# EAGLE board Smart_Charger (1) (EAGLE 8.4.2)
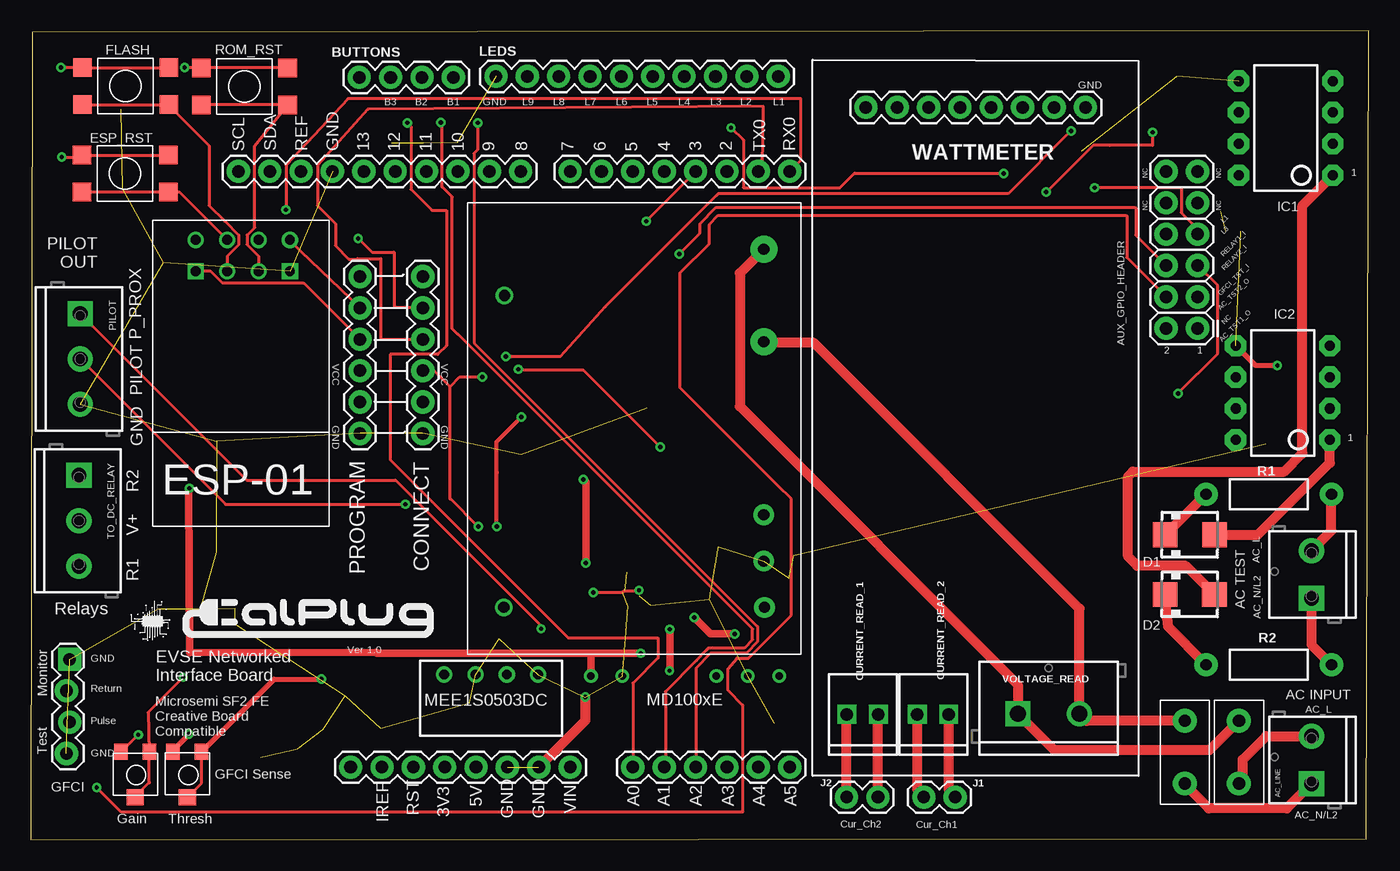
[diagram p0: board, top side]
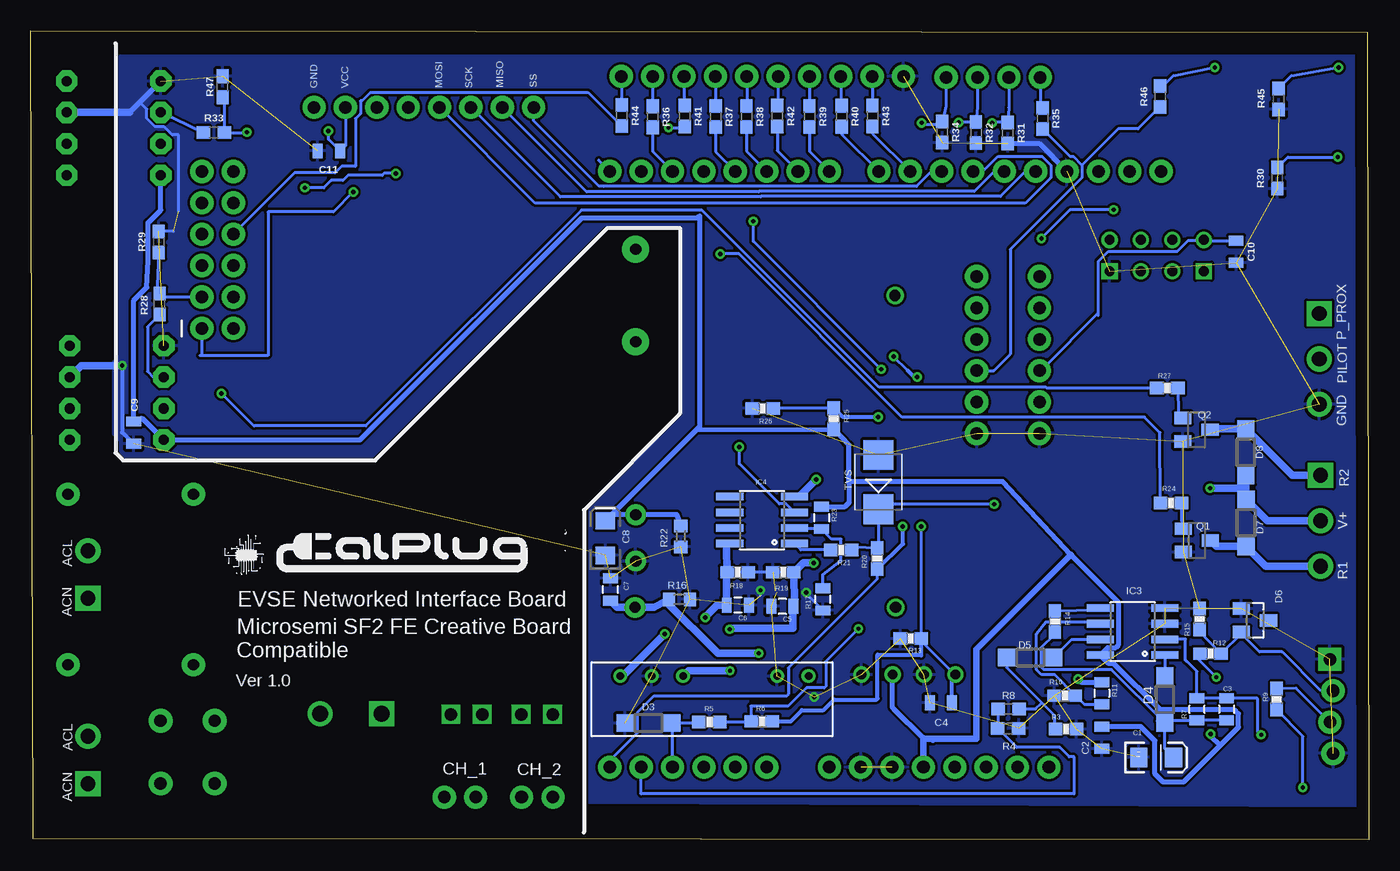
[diagram p1: board, bottom side, seen from below]

Size 108.34 x 65.5 mm. Coordinates in mm from the lower left corner, seen from the top.
Outline: 0,0 108.14,0.1 108.34,65.5 0.1,65.4 0,0
Copper layers (1*16): Top 0.035mm / dielectric 1.5mm / Bottom 0.035mm
Design rules "default": minimum track width 6mil, minimum drill 0.35mm, track to track 6mil, track to pad 6mil, pad to pad 6mil, via to via 6mil, smd to smd 6mil, copper to edge 40mil, drill to drill 6mil, minimum pad ring 10mil, minimum via ring 8mil, stop-mask expansion 4mil, vias tented up to drill 0mil, thermal gap 10mil

## Footprints (pad centres in the part's own frame; a part is rotated, then mirrored left to right if it is on the bottom)
SCREWTERMINAL-3.5MM-2_LOCK = drill 1.2 pad 2.032 square: 1 -0.178,0 | drill 1.2 pad 2.032: 2 3.678,0
2X6 = drill 1.016 pad 1.88: 1 0,0; 2 0,2.54; 3 2.54,0; 4 2.54,2.54; 5 5.08,0; 6 5.08,2.54; 7 7.62,0; 8 7.62,2.54; 9 10.16,0; 10 10.16,2.54; 11 12.7,0; 12 12.7,2.54
1X04 = drill 1.016 pad 1.88: 1 0,0; 2 2.54,0; 3 5.08,0; 4 7.62,0
EIA3216 = smd 1.4 x 1.6: A 1.4,0; C -1.4,0
0805 = smd 0.8 x 1.2: 1 -0.9,0; 2 0.9,0
EIA3216' = smd 1.4 x 1.6: + 1.4,0; - -1.4,0
1X06 = drill 1.016 pad 1.88: 1 0,0; 2 2.54,0; 3 5.08,0; 4 7.62,0; 5 10.16,0; 6 12.7,0
1X02_2.54_SCREWTERM = drill 1.016 square: P1 2.54,0; P2 0,0
SMA = smd 2 x 2: A 2,0; C -2,0
SOD123 = smd 1.4 x 1.4: A 1.9,0; C -1.9,0
SOT23 = smd 1 x 1.4: 1 -0.95,-1.1; 2 0.95,-1.1; 3 0,1.1
MPM-04E-1205 = drill 0.9 pad 1.676: 5V 3,25.25; 12V 2.95,32.75; GND 3,29 | drill 0.9 pad 2.184: ACL 3,3.75; ACN 3,11.25 | drill 0.9 pad 1.422: NC1 24,7.5 | drill 0.9: NC2 24.05,32.75
DIP_5 = drill 0.6: 1 1.93,1.13; 2 4.47,1.13; 3 12.09,1.13; 4 14.63,1.13; 5 17.17,1.13
ESP01 = drill 0.8: CH_PD -1.285,-8.178; GPIO0 1.255,-5.638; GPIO2 -1.285,-5.638; RST 1.255,-8.178; TX -3.825,-8.178; VCC 3.795,-8.178 | drill 0.8 square: GND -3.825,-5.638; RX 3.795,-5.638
BT4.5X4.5 = smd 1.5 x 1.5: P -3.5,1.5; P1 3.5,1.5; S -3.5,-1.5; S1 3.5,-1.5
BELFUSE1A = drill 1 pad 1.93: IN 2,1.66; OUT 2,6.74
1X04_LOCK = drill 1.016 pad 1.88 square: 1 0,0.127 | drill 1.016 pad 1.88: 2 2.54,-0.127; 3 5.08,0.127; 4 7.62,-0.127
DIP08 = drill 0.813 pad 1.727 octagon: 1 -3.81,-3.81; 2 -1.27,-3.81; 3 1.27,-3.81; 4 3.81,-3.81; 5 3.81,3.81; 6 1.27,3.81; 7 -1.27,3.81; 8 -3.81,3.81
SO08 = smd 0.61 x 2.21: 1 -1.905,-2.616; 2 -0.635,-2.616; 3 0.635,-2.616; 4 1.905,-2.616; 5 1.905,2.616; 6 0.635,2.616; 7 -0.635,2.616; 8 -1.905,2.616
1X02 = drill 1.016 pad 1.88: 1 0,0; 2 2.54,0
1X10 = drill 1.016 pad 1.88: 1 0,0; 2 2.54,0; 3 5.08,0; 4 7.62,0; 5 10.16,0; 6 12.7,0; 7 15.24,0; 8 17.78,0; 9 20.32,0; 10 22.86,0
4SIL = drill 0.8: 1 1.95,1.13; 2 4.49,1.13; 3 7.03,1.13; 4 9.57,1.13
SCREWTERMINAL-3.5MM-3_LOCK.007S = drill 1.2 pad 2.032 square: 1 -0.178,0 | drill 1.2 pad 2.032: 2 3.5,0; 3 7.178,0
PV3G = smd 1.1 x 1.3: P$1 0,0; P$3 2.3,0 | smd 1.4 x 1.3: P$2 1.15,3.7
AXIAL-0.4 = drill 0.9 pad 1.88: P$1 -5.08,0; P$2 5.08,0
0603-RES = smd 1.1 x 1: 1 -0.85,0; 2 0.85,0
0603 = smd 1.1 x 1: 1 -0.85,0; 2 0.85,0
R0603 = smd 1 x 1.1: 1 -0.85,0; 2 0.85,0
1X08 = drill 1.016 pad 1.88: 1 0,0; 2 2.54,0; 3 5.08,0; 4 7.62,0; 5 10.16,0; 6 12.7,0; 7 15.24,0; 8 17.78,0
SMB = smd 2.4 x 2.4: A 2.2,0; C -2.2,0
SCREWTERMINAL-5MM-2 = drill 1.3 pad 2.032 square: 1 0,0 | drill 1.3 pad 2.032: 2 5,0

## Placement (x,y rotation side)
AC_LINE  TE 1776275-2  [SCREWTERMINAL-3.5MM-2_LOCK]  103.71,4.73 90 top
AC_TEST  TE 1776275-2  [SCREWTERMINAL-3.5MM-2_LOCK]  103.71,19.74 90 top
AUX_GPIO_HEADER  2X6 FEMALE  [2X6]  94.48,41.42 90 top
BUTTONS  [1X04]  34.21,61.74 180 top
C1  10uf  [EIA3216]  17.2,6.68 0 bottom
C2  1.0uF  [0805]  21.6,8.28 90 bottom
C3  .1uf  [0805]  11.5,10.58 270 bottom
C4  4.7uF  [0805]  34.64,11.11 180 bottom
C5  1uf  [0805]  47.47,18.91 180 bottom
C6  1uf  [0805]  51.08,19.01 180 bottom
C7  2.2uf  [0805]  61.4,20.28 90 bottom
C8  10uF  [EIA3216']  61.81,24.44 90 bottom
C9  1.0uF  [0805]  100.02,32.98 270 bottom
C10  1.0uF  [0805]  10.73,47.62 270 bottom
C11  1.0uF  [0805]  84.2,55.78 180 bottom
CONNECT  FTDI  [1X06]  31.74,45.61 270 top
CURRENT_READ_1  [1X02_2.54_SCREWTERM]  68.63,10.17 180 top
CURRENT_READ_2  [1X02_2.54_SCREWTERM]  74.33,10.17 180 top
D1  1N4004  [SMA]  93.85,24.71 0 top
D2  1N4004  [SMA]  93.85,19.88 0 top
D3  1N4148  [SOD123]  58.32,9.47 180 bottom
D4  1N4148  [SOD123]  16.5,11.38 90 bottom
D5  1N4148  [SOD123]  27.4,14.78 0 bottom
D6  BAS40-06  [SOT23]  9.2,17.78 270 bottom
D7  1N4148  [SOD123]  9.93,25.67 270 bottom
D8  1N4148  [SOD123]  9.94,31.39 90 bottom
DC1  MPM-04E-1205  [MPM-04E-1205]  62.35,51.58 180 top
DC2  NNM+-12V  [DIP_5]  43.43,14.39 180 bottom
ESP1  ESP01  [ESP01]  17.15,40.4 180 top
ESP_RST  [BT4.5X4.5]  7.62,53.94 180 top
F1  BEL1AFUSE  [BELFUSE1A]  95.45,11.31 180 top
F2  BEL1AFUSE  [BELFUSE1A]  99.83,11.31 180 top
FLASH  [BT4.5X4.5]  7.68,61.03 180 top
GFCI  [1X04_LOCK]  3.01,14.62 270 top
IC1  MID400  [DIP08]  101.62,57.63 90 top
IC2  MID400  [DIP08]  101.38,36.2 90 top
IC3  LMV358  [SO08]  19.11,16.87 90 bottom
IC4  LMV358  [SO08]  49.11,25.89 90 bottom
J1  [1X02]  72.31,3.46 0 top
J2  [1X02]  66.06,3.46 0 top
LEDS  [1X10]  37.66,61.82 0 top
MEE1S0503DC  NKE0305DC  [4SIL]  43.04,14.53 180 top
PILOT  Pilot  [SCREWTERMINAL-3.5MM-3_LOCK.007S]  3.99,42.44 270 top
POT1  10k  [PV3G]  13.82,7.15 180 top
POT2  2k  [PV3G]  9.6,7.15 180 top
PROGRAM  FTDI  [1X06]  26.65,45.61 270 top
Q1  2222A  [SOT23]  13.91,24.25 270 bottom
Q2  2222A  [SOT23]  13.94,33.21 270 bottom
R1  47K  [AXIAL-0.4]  100.25,27.99 180 top
R2  47K  [AXIAL-0.4]  100.25,14.19 180 top
R3  10k  [0603-RES]  24.5,8.98 0 bottom
R4  2.0k  [0603]  29.19,9.04 180 bottom
R5  10k  [0603-RES]  53.38,9.55 180 bottom
R6  1k  [0603-RES]  49.13,9.61 180 bottom
R7  100k  [0805]  13.9,10.58 90 bottom
R8  1k  [0603]  29.17,10.61 180 bottom
R9  330  [0603-RES]  7.45,11.4 90 bottom
R10  4k  [0603-RES]  24.6,11.68 180 bottom
R11  15k  [0805]  21.6,11.88 270 bottom
R12  100  [0603-RES]  12.8,15.08 0 bottom
R13  100  [0603-RES]  37.08,16.31 180 bottom
R14  100  [0603-RES]  25.4,17.68 270 bottom
R15  330  [0603-RES]  13.7,17.88 270 bottom
R16  330  [R0603]  55.8,19.48 180 bottom
R17  50k  [0805]  44.2,19.48 90 bottom
R18  2.4k  [0603-RES]  51.1,21.68 180 bottom
R19  2.4k  [0603-RES]  47.4,21.68 180 bottom
R20  40k  [0603-RES]  39.8,22.78 90 bottom
R21  650  [0603-RES]  42.7,23.48 180 bottom
R22  180  [R0603]  55.7,24.58 90 bottom
R23  50k  [0805]  44.3,26.08 270 bottom
R24  330  [0603-RES]  16,27.28 180 bottom
R25  15k  [0603-RES]  43.32,34.1 270 bottom
R26  10k  [0603-RES]  49.06,34.94 180 bottom
R27  330  [0603-RES]  16.3,36.58 180 bottom
R28  1k  [0603]  97.9,43.38 90 bottom
R29  2.0k  [0603]  97.99,48.42 270 bottom
R30  2.0k  [0603]  7.39,53.58 90 bottom
R31  2.0k  [0603]  29.23,57.24 270 bottom
R32  2.0k  [0603]  31.8,57.26 270 bottom
R33  1k  [0603]  93.52,57.27 0 bottom
R34  2.0k  [0603]  34.53,57.31 270 bottom
R35  75  [0603]  26.41,58.42 270 bottom
R36  10  [0603]  57.98,58.55 270 bottom
R37  10  [0603]  52.88,58.56 270 bottom
R38  10  [0603]  50.38,58.57 270 bottom
R39  10  [0603]  45.28,58.58 270 bottom
R40  10  [0603]  42.68,58.59 270 bottom
R41  75  [0603]  55.38,58.6 270 bottom
R42  75  [0603]  47.88,58.61 270 bottom
R43  75  [0603]  40.18,58.62 270 bottom
R44  10  [0603]  60.48,58.64 270 bottom
R45  2.0k  [0603]  7.29,59.99 90 bottom
R46  33  [0603]  16.89,60.2 90 bottom
R47  2.0k  [0603]  92.8,60.98 90 bottom
ROM_RST  [BT4.5X4.5]  17.3,61.01 180 top
SF2_HEAD_1  [1X10]  16.8,54.13 0 top
SF2_HEAD_2  [1X08]  43.67,54.13 0 top
SF2_HEAD_3  [1X06]  48.75,5.89 0 top
SF3_HEAD_4  [1X08]  25.89,5.89 0 top
TO_DC_RELAY  [SCREWTERMINAL-3.5MM-3_LOCK.007S]  3.89,29.34 270 top
TVS  P6SMB16A  [SMB]  39.7,28.98 90 bottom
VOLTAGE_READ  [SCREWTERMINAL-5MM-2]  79.93,10.22 0 top
WATTMETER  [1X08]  67.62,59.31 0 top

## Library data of the parts
AC_LINE AC_TEST C1 C3 C5-C7 CONNECT GFCI IC1-IC4 PILOT PROGRAM R1-R3 R5-R7 R9-R15 R17-R21 R23-R27 TO_DC_RELAY = SparkFun
AUX_GPIO_HEADER = SparkFun-Connectors; PROD_ID: CONN-12423
BUTTONS = SparkFun-Connectors; PROD_ID: CONN-09696
C2 C4 C9-C11 = SparkFun-Capacitors; PROD_ID: CAP-11625
C8 = SparkFun-Capacitors; PROD_ID: CAP-00811
CURRENT_READ_1 CURRENT_READ_2 J1 J2 = SparkFun-Connectors
D1-D8 TVS = diode
DC1 = Qxd; SPICEPREFIX: X
DC2 = DCDCconverters
ESP1 = esp8266modules
ESP_RST FLASH ROM_RST = buttons
F1 F2 = Qxd
LEDS SF2_HEAD_1 = SparkFun-Connectors; PROD_ID: CONN-11563
MEE1S0503DC = NKE0503DC
POT1 POT2 = small_trimmer
Q1 Q2 = transistor-npn
R4 R29-R32 R34 R45 R47 = SparkFun-Resistors; PROD_ID: RES-08296
R8 R28 R33 = SparkFun-Resistors; PROD_ID: RES-07856
R16 R22 = rcl
R35 R41-R43 = SparkFun-Resistors; PROD_ID: RES-09737
R36-R40 R44 = SparkFun-Resistors; PROD_ID: RES-12581
R46 = SparkFun-Resistors; PROD_ID: RES-08270
SF2_HEAD_2 SF3_HEAD_4 WATTMETER = SparkFun-Connectors; PROD_ID: CONN-08438
SF2_HEAD_3 = SparkFun-Connectors; PROD_ID: CONN-08437
VOLTAGE_READ = SparkFun-Connectors; SF_SKU: PRT-08432

## Nets
3.3V: C4.1 C11.1 CONNECT.4 MEE1S0503DC.4 R6.1 R13.1 R35.2 R46.1 WATTMETER.7
12V: C6.2 DC2.5 IC4.8 R18.2
+5V: C2.2 C8.+ C9.1 DC1.5V IC1.8 IC2.8 IC3.8 MEE1S0503DC.2 POT1.P$3 R22.2 R23.1 R25.2 SF3_HEAD_4.5
+12V: C7.1 D7.C D8.C DC1.12V DC2.1 R16.2 TO_DC_RELAY.2
-12V: C5.1 DC2.3 IC4.4 R19.1
AC_TEST: AUX_GPIO_HEADER.1 R33.2 R47.1
AC_TEST_2: AUX_GPIO_HEADER.3 R28.2 R29.2
AREF: SF2_HEAD_1.3
BUTTON3: BUTTONS.3 R31.1 SF2_HEAD_3.1
CURRENT_CHANNEL_1: CURRENT_READ_2.P2 J1.2
CURRENT_CHANNEL_1_2: CURRENT_READ_2.P1 J1.1
CURRENT_CHANNEL_2: CURRENT_READ_1.P2 J2.2
CURRENT_CHANNEL_2_2: CURRENT_READ_1.P1 J2.1
DC_RELAY_1: AUX_GPIO_HEADER.6 R24.2
DC_RELAY_2: AUX_GPIO_HEADER.5 R27.2
EEPROM_RST: ESP1.GPIO2 ROM_RST.P ROM_RST.P1
EMPTY: SF3_HEAD_4.1
ESP_FLASH: ESP1.GPIO0 FLASH.P FLASH.P1
ESP_RST: ESP1.RST ESP_RST.P ESP_RST.P1
FORCE_START: BUTTONS.1 R34.1 SF2_HEAD_3.3
FORCE_STOP: BUTTONS.2 R32.1 SF2_HEAD_3.2
FUSEL: DC1.ACL F2.IN VOLTAGE_READ.1
FUSEN: DC1.ACN F1.IN VOLTAGE_READ.2
GFCI_INT: R4.2 R8.2 SF2_HEAD_3.5
GFCI_TEST: AUX_GPIO_HEADER.4 R9.1
GND: C1.C C2.1 C4.2 C5.2 C6.1 C7.2 C8.- C9.2 C10.2 C11.2 CONNECT.6 D3.A D6.1 DC1.GND DC2.2 DC2.4 ESP1.GND GFCI.1 GFCI.4 IC1.3 IC1.5 IC2.3 IC2.5 IC3.3 IC3.4 LEDS.1 MEE1S0503DC.1 MEE1S0503DC.3 PILOT.3 PROGRAM.6 Q1.2 Q2.2 R3.2 R4.1 R10.2 R13.2 R15.1 R16.1 R17.1 R18.1 R19.2 R22.1 R26.2 R29.1 R30.1 R31.2 R32.2 R34.2 R45.1 R47.2 SF2_HEAD_1.4 SF3_HEAD_4.6 SF3_HEAD_4.7 TVS.A
IOREF: SF3_HEAD_4.2
L1: AUX_GPIO_HEADER.8 R44.2
L2: R36.2 SF2_HEAD_2.6
L3: AUX_GPIO_HEADER.7 R41.2
L4: R37.2 SF2_HEAD_2.4
L5: R38.2 SF2_HEAD_2.3
L6: R42.2 SF2_HEAD_2.2
L7: R39.2 SF2_HEAD_2.1
L8: R40.2 SF2_HEAD_1.10
L9: R43.2 SF2_HEAD_1.9
MISO: SF2_HEAD_1.6 WATTMETER.2
MOSI: SF2_HEAD_1.7 WATTMETER.4
N$1: D8.A Q2.3 TO_DC_RELAY.1
N$2: Q2.1 R27.1
N$3: IC2.6 R28.1
N$4: D5.C R3.1 R8.1
N$5: POT2.P$1 POT2.P$2 R12.1
N$6: D7.A Q1.3 TO_DC_RELAY.3
N$7: POT1.P$1 POT1.P$2 R11.1
N$8: C3.1 IC3.2 POT2.P$3 R7.2
N$9: D1.C R1.P$2
N$10: IC4.2 R17.2 R23.2
N$11: IC4.1 R21.2
N$12: AC_LINE.2 F2.OUT
N$13: AC_LINE.1 F1.OUT
N$14: LEDS.10 R44.1
N$15: LEDS.9 R36.1
N$16: LEDS.8 R41.1
N$17: AC_TEST.2 R1.P$1
N$18: LEDS.7 R37.1
N$19: D1.A IC2.1
N$20: D6.2 GFCI.2 R12.2 R15.2
N$21: D4.A IC3.1
N$22: GFCI.3 R9.2
N$23: C1.A C3.2 D4.C R7.1 R14.2
N$24: IC3.6 R10.1 R11.2
N$25: D5.A IC3.7
N$26: IC3.5 R14.1
N$27: D2.C R2.P$2
N$28: D2.A IC1.1
N$29: AC_TEST.1 R2.P$1
N$30: Q1.1 R24.1
N$50: LEDS.6 R38.1
N$51: LEDS.5 R42.1
N$52: LEDS.4 R39.1
N$54: LEDS.2 R43.1
N$73: ESP1.CH_PD
N$75: LEDS.3 R40.1
N$77: R46.2 ROM_RST.S ROM_RST.S1
N$78: FLASH.S FLASH.S1 R45.2
N$81: IC1.6 R33.1
N$83: ESP_RST.S ESP_RST.S1 R30.2
N$93: BUTTONS.4 R35.1
NC3: WATTMETER.8
PILOT: PILOT.2 R20.2 R21.1 TVS.C
PILOTREAD: R20.1 R25.1 R26.1 SF2_HEAD_3.6
PP: PILOT.1 R5.1 R6.2
PP_READ: D3.C R5.2 SF2_HEAD_3.4
PWM: IC4.3 SF2_HEAD_2.5
RESET: SF3_HEAD_4.3
RX: CONNECT.2 SF2_HEAD_2.8
RX_E: ESP1.RX PROGRAM.3
SCK: SF2_HEAD_1.5 WATTMETER.3
SCL: SF2_HEAD_1.1
SDA: SF2_HEAD_1.2
SS: SF2_HEAD_1.8 WATTMETER.1
TX: CONNECT.3 SF2_HEAD_2.7
TX_E: ESP1.TX PROGRAM.2
VCC_E: C10.1 ESP1.VCC PROGRAM.4
VIN: SF3_HEAD_4.8

## Tracks (layer width: path | path; a pad name or v marks a point on that pad's centre or on a via)
3.3V  (via drill 0.35)
  Top 0.254: v84.24,57.4 79.16,52.32 55.98,52.32 55.98,52.33 55.89,52.32 55.65,52.32 55.64,52.31 | 55.64,52.31 55.65,52.31 55.66,52.32 55.82,52.33 | 55.64,52.31 55.53,52.19 46.51,43.16 42.86,39.14 v38.46,39.14 | v36.23,25.37 33.98,27.62 33.94,27.62 33.94,36.7 | 33.94,36.7 32.65,37.99 CONNECT.4 | v36.57,37.49 34.74,37.49 33.94,36.7
  Bottom 0.152: 36.18,16.29 36.23,16.24
  Bottom 0.254: 23.2,54.64 23.92,55.35 24.19,55.35 R35.2 | 23.2,54.64 23.2,53.63 29.02,47.81 29.02,39.34 30.37,37.99 CONNECT.4 | R46.1 18.67,57.57 20.27,57.57 23.2,54.64 | WATTMETER.7 82.86,56.22 C11.1 84.24,56.71 v84.24,57.4 | 37.32,37.99 v38.46,39.14 | 33.74,13.12 33.5,13.37 36.23,16.1 36.23,16.24 v36.23,25.37
  Bottom 0.305: v36.57,37.49 36.82,37.49 37.32,37.99 | C4.1 33.74,13.12 MEE1S0503DC.4 | R6.1 46.8,9.61 45.9,10.51 44.14,10.51 43.28,11.37 39.85,11.37 39.77,11.46 39.77,15 36.28,15 36.22,14.95 36.22,16.1 36.23,16.1
  Bottom 0.406: R13.1 36.18,16.29
12V  (via drill 0.35)
  Top 0.61: v53.74,18 55.03,16.7 56.9,16.7 56.92,16.68 v57,16.68
  Bottom 0.254: 52,23.71 arc90 IC4.8
  Bottom 0.61: 52,23.71 R18.2 51.98,21.66 C6.2 52.77,19.01 53.63,18.15 53.63,18.11 v53.74,18 | v57,16.68 60.41,13.26 DC2.5
+5V  (via drill 0.35)
  Top 0.406: POT1.P$3 11.52,7.28 v12.81,8.57
  Bottom 0.406: R22.2 56.03,26.33 DC1.5V 61.32,26.33 C8.+ 54.45,33.2 | 12.02,7.66 10.55,9.13 10.55,10.23 10.86,10.54 16.88,10.54 20.62,14.28 21.05,14.28 IC3.8 21.12,15.58 20.48,15.58 20.27,15.78 20.27,19.23 24.13,23.09 29.62,29.01 41.9,29.01 42.08,28.83 | R23.1 42.41,26.98 42.08,27.31 42.08,28.83 | 54.45,33.2 R25.2 42.08,31.97 42.08,28.83 | 54.45,33.2 54.19,33.47 54.19,50.52 54.34,50.37 63.71,50.37 81.69,32.39 IC2.8 99.31,34.13 C9.1 100.01,33.89 100.01,43.68 98.94,44.75 98.84,46.88 98.84,49.97 97.81,51 IC1.8 | 36.05,8.23 38.46,10.64 arc90 38.55,10.72 MEE1S0503DC.2 | v12.81,8.57 12.81,8.46 12.02,7.66 | 12.02,7.66 15.01,4.68 16.64,4.68 17.31,5.34 17.31,8.04 18.46,9.18 C2.2
  Bottom 0.508: 24.13,23.09 31.77,15.45 31.77,8.18 35.2,8.18 | 35.2,8.18 35.28,8.1 | 35.2,8.18 36,8.18 36.05,8.23 SF3_HEAD_4.5
+12V  (via drill 0.35)
  Top 0.61: v12.84,28.47 12.79,28.42 12.88,15.14 27.97,15.18 28.02,15.13 45.3,15.13 | v49.39,15.12 v49.38,15.13 49.02,15.13 45.3,15.13 | DC2.1 45.36,15.06 45.3,15.13
  Bottom 0.61: TO_DC_RELAY.2 8.2,25.84 D7.C 9.93,28.47 | 9.93,28.47 D8.C | v12.84,28.47 9.93,28.47 | 56.92,19.34 R16.2 | 56.92,19.34 57.88,18.83 DC1.12V 60.85,18.83 C7.1 | v49.39,15.12 52.71,15.12 56.92,19.34
-12V  (via drill 0.35)
  Top 0.61: v44.74,29.18 44.97,28.95 44.97,22.45 v44.94,22.43 | v51.75,17.06 51.76,17.06 51.76,13.74 v51.72,13.7
  Bottom 0.61: IC4.4 46.15,27.8 44.76,29.18 v44.74,29.18 | v44.94,22.43 45.76,22.43 R19.1 46.5,18.98 C5.1 46.64,18.85 46.64,17.14 51.64,17.14 51.74,17.04 51.75,17.05 v51.75,17.06 | v51.72,13.7 55.09,13.7 DC2.3
AC_TEST  (via drill 0.35)
  Top 0.254: v90.84,57.3 90.84,56.23 87.38,56.23 86.04,56.23 82.23,52.43 82.21,52.43 82.23,52.44 v82.23,52.46
  Bottom 0.254: R47.1 92.67,60 R33.2 90.74,57.27 90.7,57.24 90.77,57.24 v90.84,57.3 | AUX_GPIO_HEADER.1 94.48,39.35 94.63,39.2 89.13,39.2 89.13,50.86 83.84,50.86 v82.23,52.46
AC_TEST_2
  Bottom 0.254: R29.2 98.15,43.98 R28.2 97.63,43.96 AUX_GPIO_HEADER.3
BUTTON3  (via drill 0.35)
  Top 0.254: v30.49,58.06 30.79,57.76 30.79,52.67 32.49,50.97 33.66,50.97 33.66,40.03 32.94,39.31 29.09,39.31 | 29.09,39.31 | 29.09,39.31 29.09,30.77 43.51,16.36 50.78,16.36 50.81,16.33 50.81,14.75 48.75,12.7 SF2_HEAD_3.1
  Bottom 0.254: BUTTONS.3 29.13,59.3 R31.1 | R31.1 29.23,57.83 | R31.1 30.46,58.09 v30.49,58.06
CURRENT_CHANNEL_1
  Top 0.813: J1.2 74.33,4.13 CURRENT_READ_2.P2
CURRENT_CHANNEL_1_2
  Top 0.813: J1.1 71.79,4.13 CURRENT_READ_2.P1
CURRENT_CHANNEL_2
  Top 0.813: J2.2 68.6,10.14 CURRENT_READ_1.P2
CURRENT_CHANNEL_2_2
  Top 0.813: J2.1 66.06,10.14 CURRENT_READ_1.P1
DC_RELAY_1  (via drill 0.35)
  Top 0.254: v52.5,47.43 54.17,49.11 54.17,49.89 55.5,51.22 89.43,51.22 89.47,51.18 89.47,48.97 AUX_GPIO_HEADER.6
  Bottom 0.254: R24.2 16.9,32.98 18.16,34.23 37.79,34.23 51.01,47.44 52.42,47.44 52.45,47.41 52.47,47.43 v52.5,47.43
DC_RELAY_2  (via drill 0.35)
  Top 0.254: v92.9,36.15 96.12,39.37 96.12,44.91 94.53,46.5 AUX_GPIO_HEADER.5
  Bottom 0.254: R27.2 26.06,36.58 26.15,36.67 39.66,36.67 53.99,51 63.76,51 81.23,33.53 90.23,33.53 90.27,33.5 92.9,36.13 v92.9,36.15
EEPROM_RST
  Top 0.254: ESP1.GPIO2 18.44,47.26 17.51,48.19 17.51,48.97 18.12,49.58 18.12,56.2 20.58,59.29 20.58,59.51 | 20.58,59.51 ROM_RST.P1 | 20.58,59.51 ROM_RST.P
ESP_FLASH
  Top 0.254: FLASH.P1 FLASH.P 11.18,59.46 14.43,56.21 14.43,51.37 15.68,50.11 | ESP1.GPIO0 15.9,47.26 16.83,48.19 16.83,48.97 15.68,50.11 | 15.68,50.11 15.58,50.21
ESP_RST
  Top 0.254: ESP_RST.P1 ESP_RST.P 12.04,52.44 ESP1.RST
FORCE_START  (via drill 0.35)
  Top 0.254: SF2_HEAD_3.3 53.93,6.02 53.93,13.96 55.04,15.13 57.94,15.13 58.86,16.05 58.86,17.27 35.9,40.22 35.89,55.58 36.19,55.89 v36.19,58.06
  Bottom 0.254: BUTTONS.1 34.21,59.39 R34.1 34.53,57.91 36.04,57.91 v36.19,58.06
FORCE_STOP  (via drill 0.35)
  Top 0.254: 33.26,58.02 v33.2,58.08 33.3,57.98 33.3,52.88 34.13,52.05 34.13,41.37 34.56,40.94 34.61,40.94 58.45,17.1 58.45,16.22 57.77,15.54 55.2,15.54 55.2,15.55 55.04,15.54 54.87,15.54 54.86,15.54 54.75,15.42 54.64,15.3 53.91,14.54 51.38,12 51.38,5.98 SF2_HEAD_3.2
  Bottom 0.254: BUTTONS.2 31.67,59.36 R32.1 | R32.1 31.8,57.86 | R32.1 33.16,58.11 33.17,58.12 33.2,58.09 v33.2,58.08
FUSEL
  Top 0.813: F2.IN 95.47,7.29 82.86,7.29 VOLTAGE_READ.1 79.93,12.59 57.41,35.1 57.41,45.89 DC1.ACL
FUSEN
  Top 0.813: DC1.ACN 59.43,40.25 63.41,40.25 84.93,18.74 VOLTAGE_READ.2 85.5,9.65 F1.IN
GFCI_INT
  Bottom 0.254: R8.2 30.02,9.07 R4.2 28.5,7.5 25.02,7.5 24.24,6.72 23.84,6.72 23.84,3.76 23.87,3.73 58.89,3.73 58.92,3.7 SF2_HEAD_3.5
GFCI_TEST  (via drill 0.35)
  Top 0.254: AUX_GPIO_HEADER.4 88.74,47.16 88.74,50.53 88.7,50.57 55.66,50.57 54.94,49.85 54.94,48.28 52.59,45.93 52.59,36.6 60.52,28.67 61.58,27.61 61.58,18.2 58.11,14.73 57.18,14.73 56.47,13.85 56.47,12.11 57.65,10.92 57.65,2.25 7.33,2.25 v5.33,4.25
  Bottom 0.254: v5.33,4.25 5.33,8.38 R9.1
GND  (via drill 0.35)  (48 unrouted)
  Top 0.254: v45.54,20.05 47.92,20.05 48.06,20.19 49.23,20.19 v49.25,20.22
  Top 0.406: v100.95,38.4 99.18,38.4 IC2.5
  Top 0.813: v44.9,11.57 44.9,9.66 SF3_HEAD_4.7
  Bottom 0.254: 96.79,49.27 R29.1 | 96.37,50.89 96.37,57.09 96.89,57.09 97.55,57.76 98.29,57.76 98.96,58.43 98.96,59.16 99.52,59.73 | R19.2 R18.1 | R17.1 45.54,19.92 v45.54,20.05 45.54,20.14 | v49.25,20.22 49.25,19.79
  Bottom 0.305: v100.95,38.4 100.95,33 C9.2
  Bottom 0.406: 100.35,58.9 99.52,59.73 IC1.5 | R31.2 26.68,56.39 SF2_HEAD_1.4
  Bottom 0.61: v100.95,38.4 104.26,38.4 IC2.3 | IC1.3 100.35,58.9
  pour Bottom (isolate 0.203): 0.78,63.45 101.16,63.45 101.16,39.24 101.67,38.72 101.67,32.83 101.1,32.27 101.1,31.45 100.68,31.03 80.65,31.03 61.88,49.79 56.59,49.79 55.48,49.76 55.48,34.37 63.1,26.86 63.1,3.05 0.79,2.76 0.79,63.15 0.94,63.3
L1
  Bottom 0.254: AUX_GPIO_HEADER.8 86.99,54 83.71,54 83.18,54.53 82.05,54.53 82.05,58.4 81.64,58.81 81.64,59.81 81.62,59.84 81.52,59.84 80.83,60.53 63.22,60.53 R44.2
L2
  Bottom 0.254: SF2_HEAD_2.6 57.98,55.74 R36.2
L3  (via drill 0.35)
  Top 0.254: v56.7,57.66 57.69,56.67 57.69,52.81 65.53,52.81 66.7,53.98 78.75,53.98 v78.78,53.96 | v86.14,52.8 93.12,52.8 93.16,52.76 93.16,50.79 94.48,49.47 AUX_GPIO_HEADER.7
  Bottom 0.254: R41.2 55.5,57.63 56.67,57.63 v56.7,57.66 | v78.78,53.96 79.75,53.96 79.89,53.81 82.65,53.81 83.05,53.41 84.02,53.41 84.63,52.8 86.07,52.8 | 86.01,52.78 86.03,52.76 86.07,52.8 | 86.07,52.8 v86.14,52.8
L4
  Bottom 0.254: SF2_HEAD_2.4 52.88,55.72 R37.2
L5
  Bottom 0.254: SF2_HEAD_2.3 50.38,55.76 R38.2
L6
  Bottom 0.254: SF2_HEAD_2.2 47.88,55.8 R42.2
L7
  Bottom 0.254: SF2_HEAD_2.1 45.28,55.74 R39.2
L8
  Bottom 0.254: SF2_HEAD_1.10 42.61,57.07 42.68,57.15 R40.2
L9
  Bottom 0.254: SF2_HEAD_1.9 40.18,57.19 R43.2
MISO
  Bottom 0.254: SF2_HEAD_1.6 30.32,54.13 31.95,52.51 49.38,52.51 49.41,52.47 63.33,52.47 WATTMETER.2
MOSI
  Bottom 0.254: SF2_HEAD_1.7 31.23,54.13 30.01,55.35 26.46,55.35 25.74,54.64 25.74,53.63 27.81,51.56 67.49,51.56 WATTMETER.4
N$1
  Bottom 0.254: D8.A 9.57,32.92
  Bottom 0.61: Q2.3 12.76,33.29 D8.A 6.17,29.52 TO_DC_RELAY.1
N$2
  Bottom 0.254: R27.1 15.4,34.52 Q2.1
N$3
  Bottom 0.254: R28.1 98.89,41.54 98.89,37.95 98.42,37.47 IC2.6
N$4
  Bottom 0.254: D5.C 29.3,13.95 26.48,11.12 | 26.48,11.12 25.46,10.11 25.46,9.04 R3.1 | R8.1 26.98,10.61 26.48,11.12
N$5  (via drill 0.35)
  Top 0.254: v12.34,13.18 9.5,10.34 POT2.P$1 9.6,4.68 | 9.6,4.68 9.6,4.6 | POT2.P$2 8.45,3.53 9.6,4.68
  Bottom 0.254: v12.34,13.18 13.7,14.55 R12.1
N$6
  Bottom 0.61: Q1.3 12.33,23.77 D7.A 8.33,22.16 TO_DC_RELAY.3
N$7  (via drill 0.35)
  Top 0.254: POT1.P$2 13.82,4.61 POT1.P$1
  Top 0.406: POT1.P$1 19.7,13.03 v23.52,13.03
  Bottom 0.406: v23.52,13.03 23.27,12.78 R11.1
N$8  (via drill 0.35)
  Top 0.254: POT2.P$3 7.33,7.15 v8.7,8.51
  Bottom 0.152: 16.03,16.24 16.34,16.24 IC3.2
  Bottom 0.254: C3.1 R7.2 13.9,13.66 14.71,14.46 14.76,14.46 14.84,14.54 14.84,16.27 14.87,16.24 16.34,16.24 | 11.37,11.61 C3.1 | C3.1 11.48,11.46 9.03,11.46 8.99,11.41 8.99,8.77 v8.7,8.51
N$9
  Top 0.813: D1.C 91.9,24.71 R1.P$2
N$10
  Bottom 0.254: IC4.2 46.42,25.18 R23.2 43.48,24.36 43.09,24.36 42.72,24.35 42.72,22.62 44.2,21.49 R17.2
N$11
  Bottom 0.254: R21.2 45.99,23.48 IC4.1
N$12
  Top 0.813: F2.OUT 98.14,4.88 98.14,6.5 100.05,8.41 AC_LINE.2
N$13
  Top 0.813: AC_LINE.1 101.73,2.57 95.39,2.56 93.45,4.49 F1.OUT
N$14
  Bottom 0.254: LEDS.10 60.52,59.53 R44.1
N$15
  Bottom 0.254: LEDS.9 R36.1
N$16
  Bottom 0.254: LEDS.8 55.44,59.51 R41.1
N$17
  Top 0.813: AC_TEST.2 105.33,25.04 R1.P$1
N$18
  Bottom 0.254: LEDS.7 52.9,59.43 R37.1
N$19
  Top 0.813: D1.A 99.37,24.71 105.19,30.54 IC2.1
N$20
  Bottom 0.254: 10.3,16.68 D6.2 | 10.3,16.68 R12.2 13.7,16.88 R15.2 | GFCI.2 3.86,12.08 7,15.22 8.84,15.22 10.3,16.68
N$21
  Bottom 0.254: IC3.1 D4.A
N$22
  Bottom 0.254: GFCI.3 5.89,12.3 R9.2
N$23
  Bottom 0.254: C3.2 R7.1 16.3,9.68 16.35,9.63 | 16.35,9.63 D4.C | 25.4,16.6 R14.2 25.4,16.68 26.48,15.6 26.48,13.97 26.32,13.8 20.82,13.8 D4.C | 17.13,9.63 16.35,9.63 | C1.A 16.5,7.38 D4.C
N$24
  Bottom 0.254: R11.2 23,10.98 R10.1 25.42,13.4 26.49,13.4 26.89,13.8 26.89,16.69 26.15,17.67 21.91,17.67 21.83,17.41 IC3.6
N$25
  Bottom 0.254: D5.A 24.05,16.24 IC3.7
N$26
  Bottom 0.254: IC3.5 21.93,18.58 R14.1
N$27
  Top 0.813: R2.P$2 92.1,17.27 D2.C
N$28
  Top 0.813: D2.A 93.53,22.19 89.6,22.19 88.84,22.95 88.84,29.42 89.24,29.82 101.49,29.82 102.97,31.3 102.97,51.36 IC1.1
N$29
  Top 0.813: AC_TEST.1 103.71,15.81 R2.P$1
N$30
  Bottom 0.254: Q1.1 15.1,25.29 R24.1
N$50
  Bottom 0.254: LEDS.6 50.36,59.44 R38.1
N$51
  Bottom 0.254: LEDS.5 47.82,59.52 R42.1
N$52
  Bottom 0.254: LEDS.4 R39.1
N$54
  Bottom 0.254: LEDS.2 40.2,59.49 R43.1
N$75
  Bottom 0.254: LEDS.3 42.74,59.5 R40.1
N$77  (via drill 0.35)
  Top 0.254: v12.46,62.55 12.5,62.51 ROM_RST.S1 ROM_RST.S
  Bottom 0.254: R46.2 16.63,61.05 15.8,61.88 v12.46,62.55
N$78  (via drill 0.35)
  Top 0.254: v2.44,62.55 4.16,62.55 FLASH.S1 FLASH.S
  Bottom 0.254: R45.2 6.25,61.88 v2.44,62.55
N$81
  Bottom 0.254: R33.1 IC1.6
N$83  (via drill 0.35)
  Top 0.254: v2.5,55.28 3.96,55.28 ESP_RST.S1 ESP_RST.S
  Bottom 0.254: R30.2 6.54,55.28 v2.5,55.28
N$93
  Bottom 0.254: BUTTONS.4 26.59,59.45 R35.1
PILOT  (via drill 0.35)
  Top 0.254: PILOT.2 15.76,27.18 v30.32,27.18
  Bottom 0.254: R21.1 41.6,23.68 R20.2 39.7,23.78 TVS.C 39.31,27.18 v30.32,27.18
PILOTREAD  (via drill 0.35)
  Top 0.305: v37.73,25.37 37.73,29.77 37.7,29.79 37.7,32.23 v39.71,34.24
  Bottom 0.254: R25.1 43.32,35 43.38,34.94 R26.1 | R20.1 39.8,21.13 47,13.93 47,11.82 47.18,11.64 57.9,11.64 59.24,10.3 59.24,8.66 61.45,6.45 SF2_HEAD_3.6
  Bottom 0.305: R20.1 37.7,23.98 37.7,25.3 37.73,25.32 v37.73,25.37 | v39.71,34.24 42.55,34.24 43.32,35
PP  (via drill 0.35)
  Top 0.254: PILOT.1 17.48,29.14 29.53,29.14 41.32,17.35 v41.32,17.11
  Bottom 0.254: 50.09,9.55 R5.1 | R6.2 50.09,9.55 | 50.09,9.55 50.04,9.61 50.04,10.83 47.01,10.83 45.53,12.31 44.08,12.31 43.96,12.43 43.96,14.46 v41.32,17.11
PP_READ
  Bottom 0.254: R5.2 54.36,9.47 D3.C 56.42,5.94 SF2_HEAD_3.4
PWM  (via drill 0.35)
  Top 0.254: v50.96,31.82 44.74,38.05 39.52,38.05 39.49,38.08 v39.49,38.11 | v49.83,50.09 53.83,54.1 SF2_HEAD_2.5
  Bottom 0.254: IC4.3 47.18,27.21 47.72,27.21 50.96,30.46 v50.96,31.82 | v39.49,38.11 49.83,48.45 v49.83,50.09
RX  (via drill 0.35)
  Top 0.254: v20.66,51.02 20.66,54.64 25.69,60.02 62.37,60.02 62.37,55.04 SF2_HEAD_2.8 | v26.5,48.71 27.62,47.59 29.41,47.59 29.41,43.12 31.44,43.12 CONNECT.2
  Bottom 0.254: SF2_HEAD_2.8 62.37,55.04 | v20.66,51.02 24.19,51.02 26.46,48.75 | 26.46,48.75 | 26.46,48.75 v26.5,48.71
RX_E
  Top 0.254: ESP1.RX 14.58,46.04 15.51,45.11 22.08,45.11 PROGRAM.3
SCK
  Bottom 0.254: SF2_HEAD_1.5 27.78,54.13 29.81,52.1 49.21,52.1 49.24,52.07 65.46,52.07 WATTMETER.3
SS
  Bottom 0.254: SF2_HEAD_1.8 35.4,54.13 36.62,52.91 61.96,52.91 61.98,52.93 62.34,52.93 67.62,58.21 WATTMETER.1
TX
  Top 0.254: SF2_HEAD_2.7 59.24,54.46 59.32,59.38 27.29,59.15 23.2,54.64 23.2,51.36 24.66,49.9 24.66,48.11 25.74,47.03 26.42,47.03 26.46,47.07 28.34,47.07 28.34,40.52 28.34,40.53 CONNECT.3
TX_E
  Top 0.254: ESP1.TX 20.98,48.49 PROGRAM.2
VCC_E
  Bottom 0.254: C10.1 13.3,48.52 13.33,48.55 | 13.33,48.55 ESP1.VCC | 13.33,48.55 14.61,48.55 15.51,47.65 21.08,47.65 21.91,46.81 21.91,42.63 | 21.91,42.63 21.91,42.48 | 21.91,42.63 26.4,38.14 PROGRAM.4

## Text on the board
tPlace: GND | B3 | B2 | B1 | GND | L9 | L8 | L7 | L6 | L5 | L4 | L3 | L2 | L1 | SCL | SDA | REF | GND | 13 | 12 | 11 | 10 | 9 | 8 | 7 | 6 | 5 | 4 | 3 | 2 | TX0 | RX0 | NC | NC | 1 | NC | NC | L1 | L3 | PILOT / OUT | RELAY1_I | RELAY2_I | GFCI_TST_I | P_PROX | AC_TST2_O | AC_TST1_O | NC | PILOT | 2 | 1 | VCC | VCC | GND | GND | GND | 1 | R2 | V+ | AC_L | R1 | AC TEST | AC_N/L2 | Relays | Monitor | Ver 1.0 | GND | EVSE Networked / Interface Board | Return | MD100xE | AC INPUT | AC_L | Test | Pulse | Microsemi SF2 FE / Creative Board / Compatible | GND | GFCI Sense | 5V | A0 | A1 | A2 | A3 | A4 | A5 | RST | 3V3 | GND | GND | VIN | AC_N/L2 | Gain | Thresh | IREF | Cur_Ch2 | Cur_Ch1
bPlace: SS | MISO | SCK | MOSI | VCC | GND | P_PROX | PILOT | GND | R2 | V+ | ACL | R1 | ACN | EVSE Networked Interface Board | Microsemi SF2 FE Creative Board / Compatible | Ver 1.0 | ACL | CH_2 | CH_1 | ACN